# Altium PCB PCB1.PcbDoc
Units mil, origin at the board's own origin, x right, y up, seen from the top; angles counter-clockwise.
Board outline 1735.03 x 1910.03 mil, 2 copper layers (Top Layer, Bottom Layer); 47 components, 65 nets, 275 pads, 71 vias.
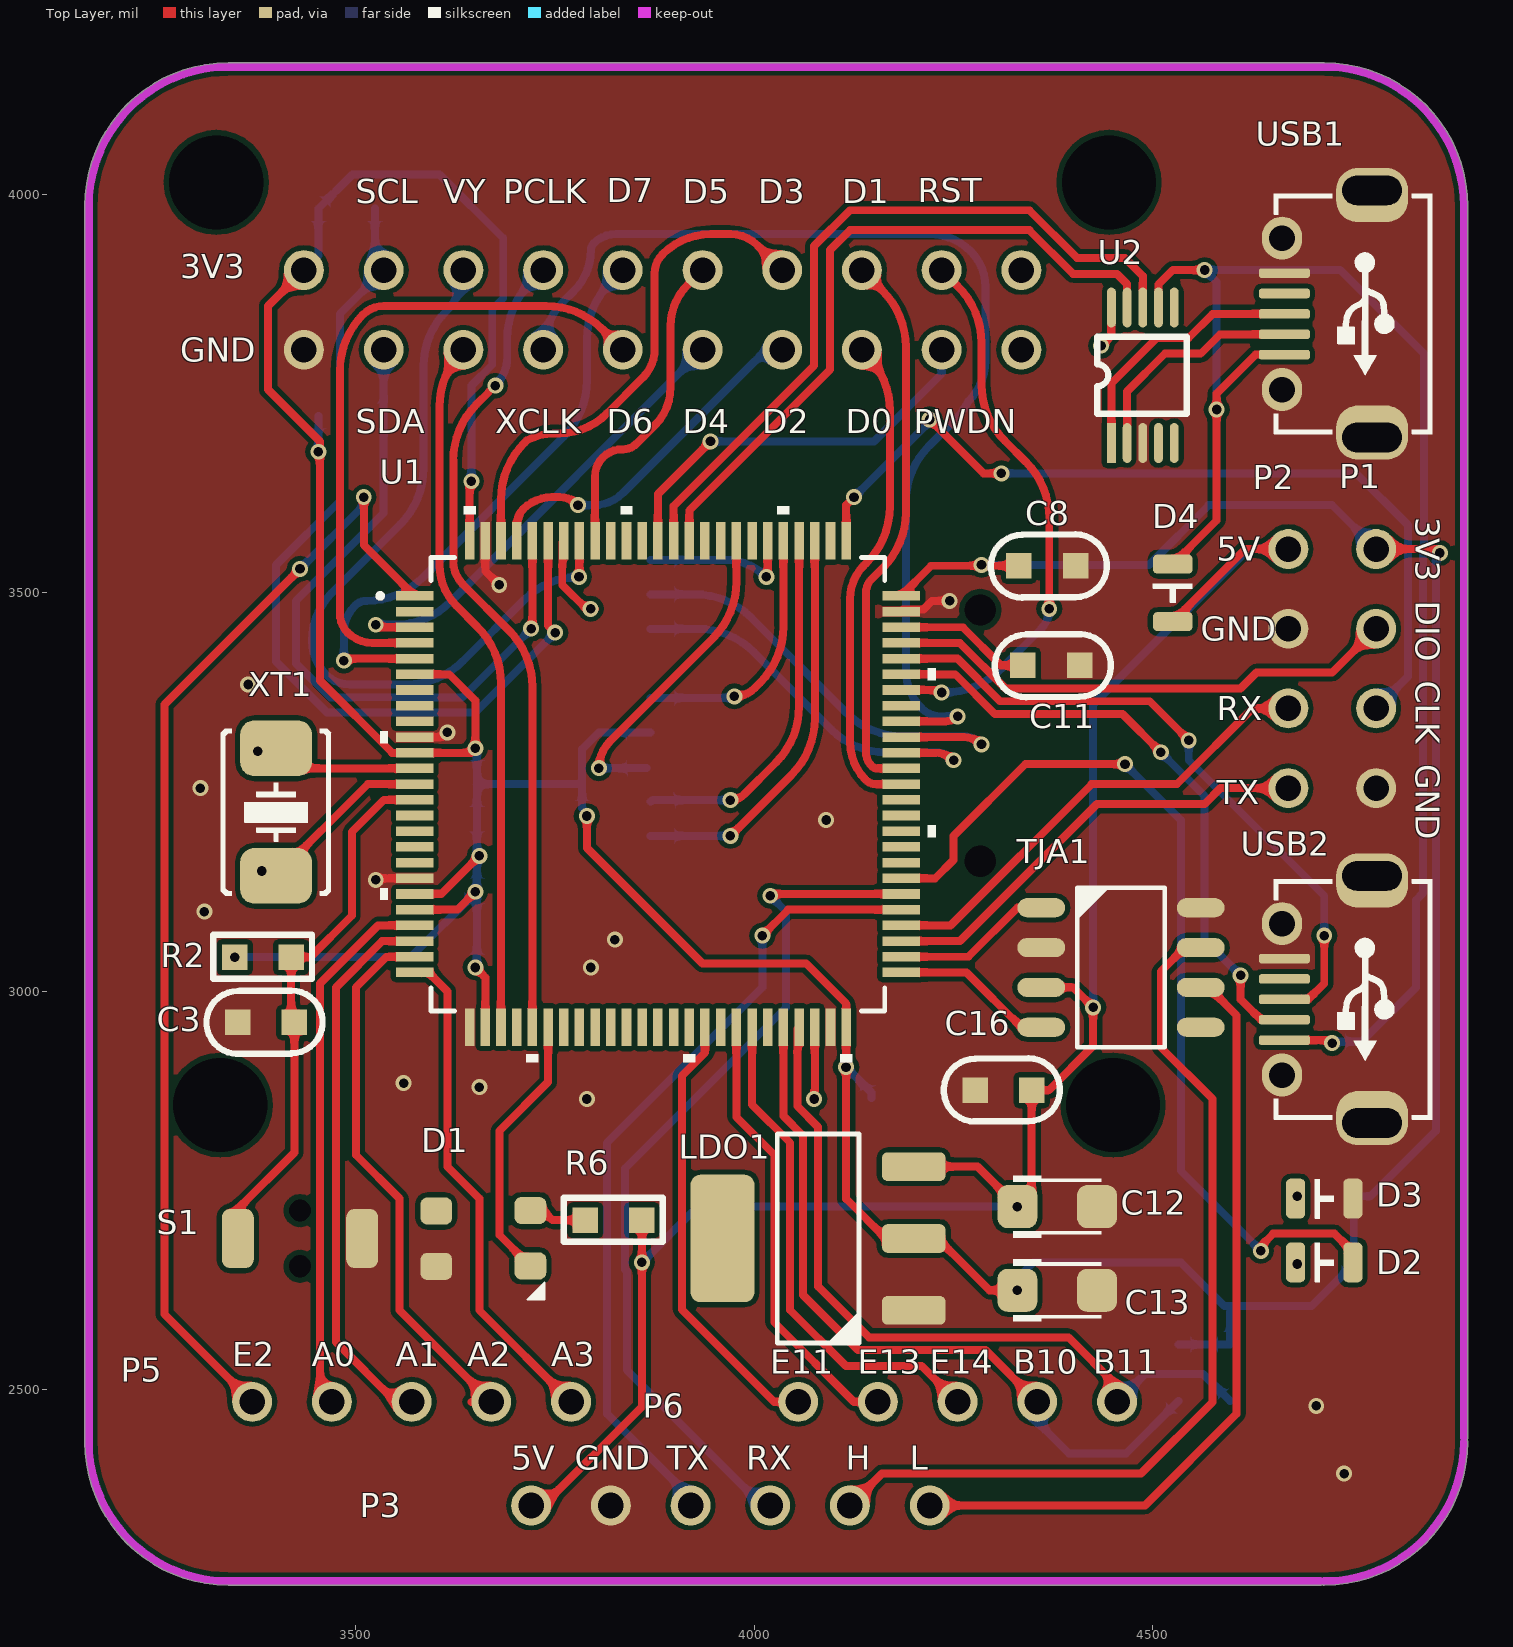
[diagram p0: Top Layer view]
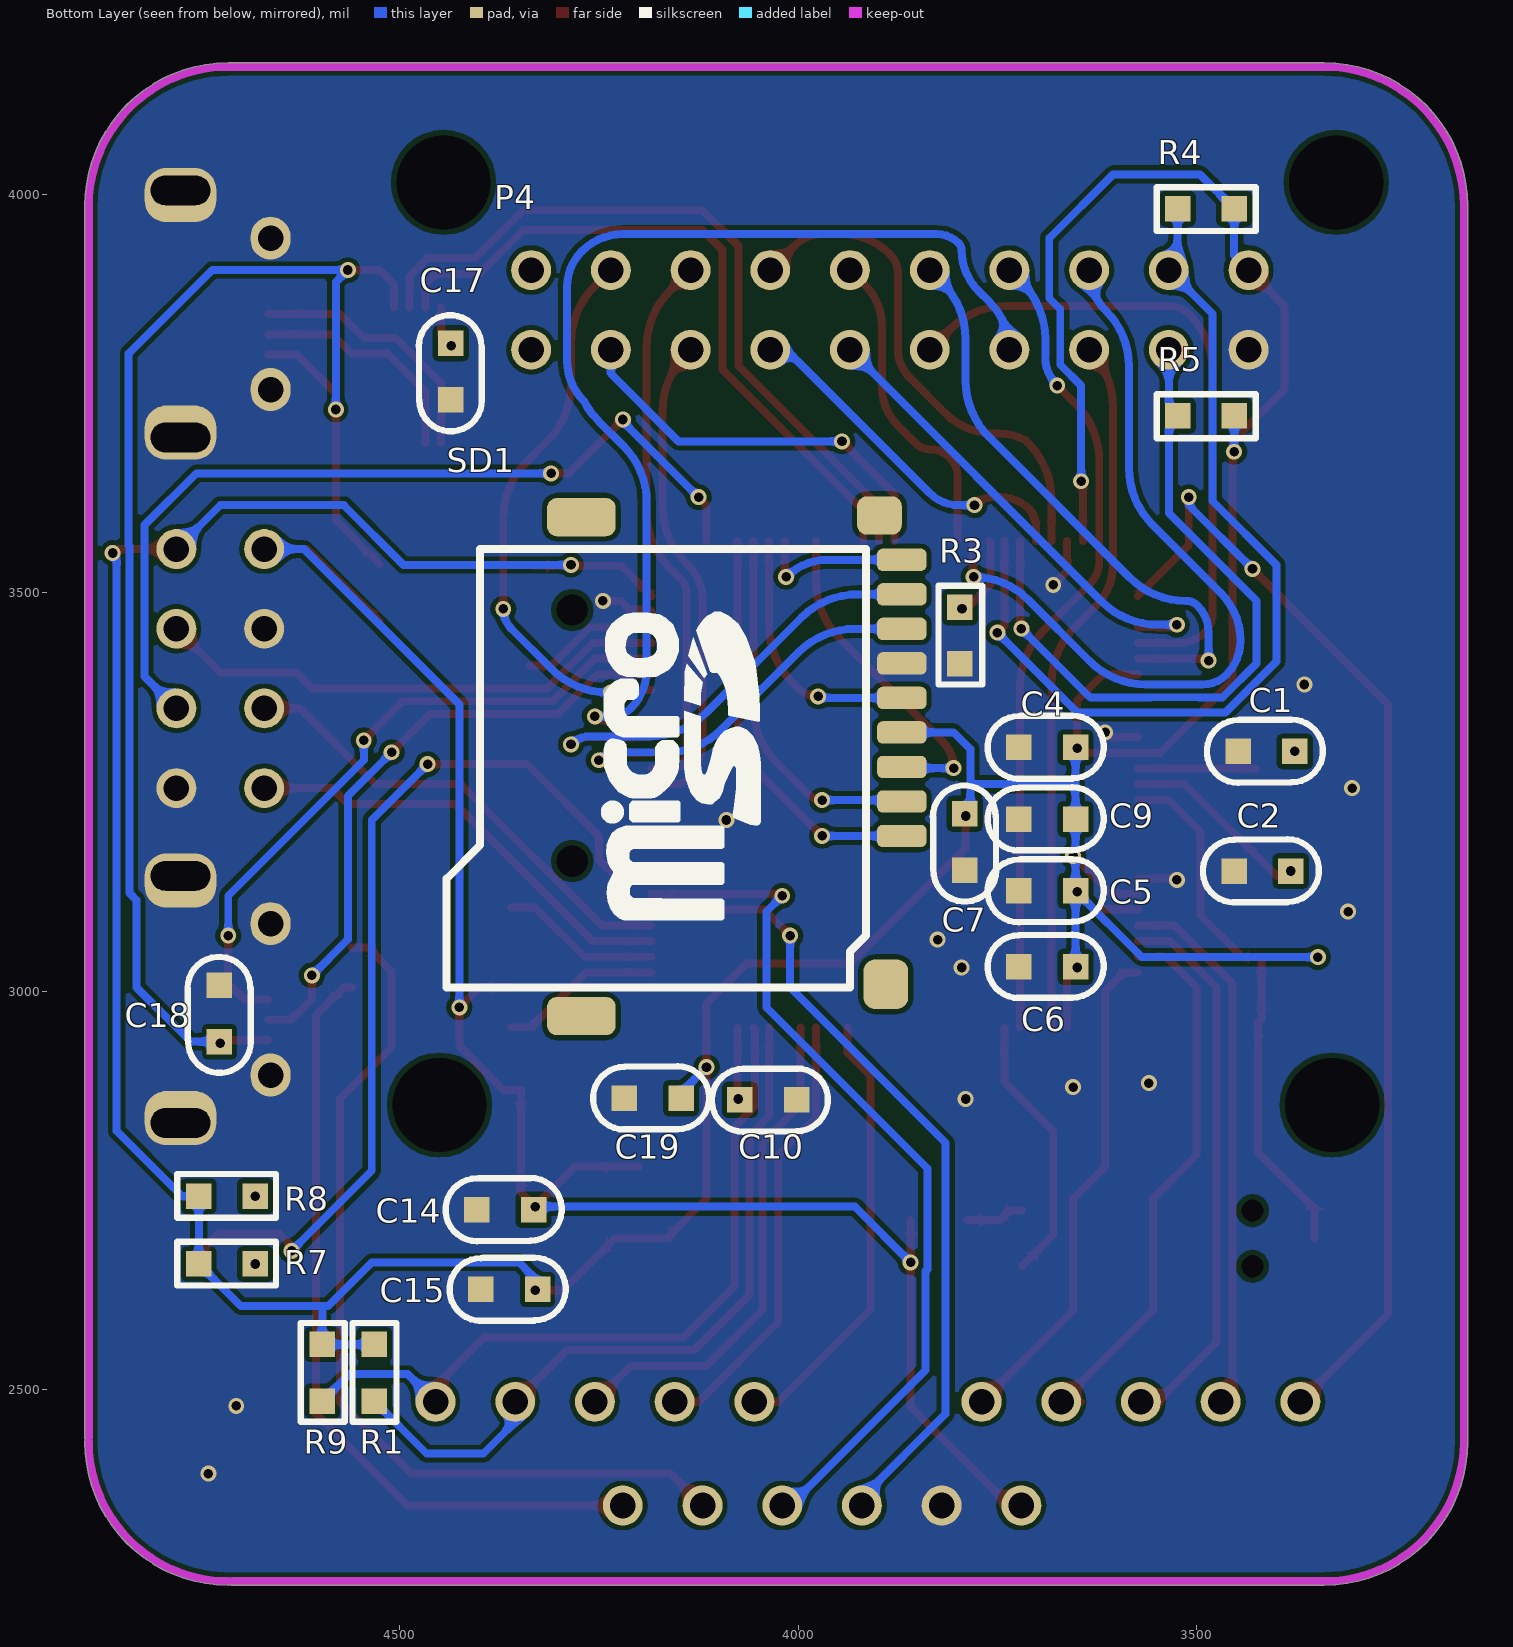
[diagram p1: Bottom Layer view, seen from below]
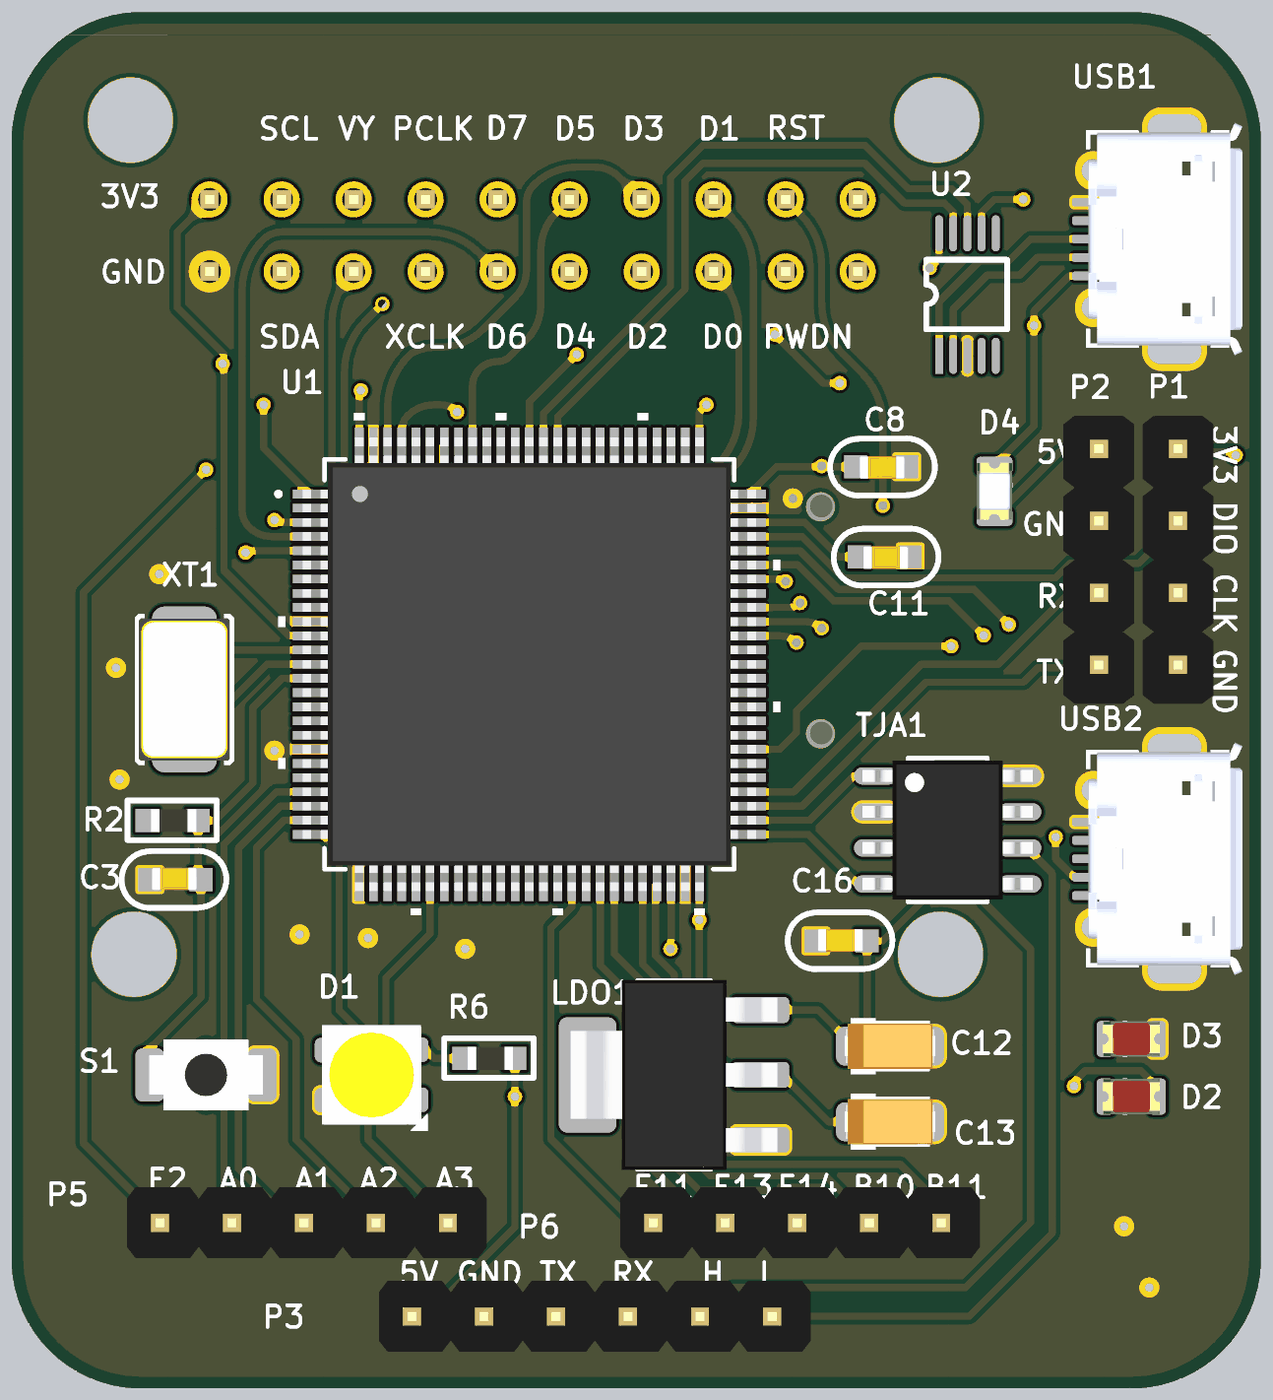
[diagram p2: 3D render of the assembled board from above, using the file's embedded part models]
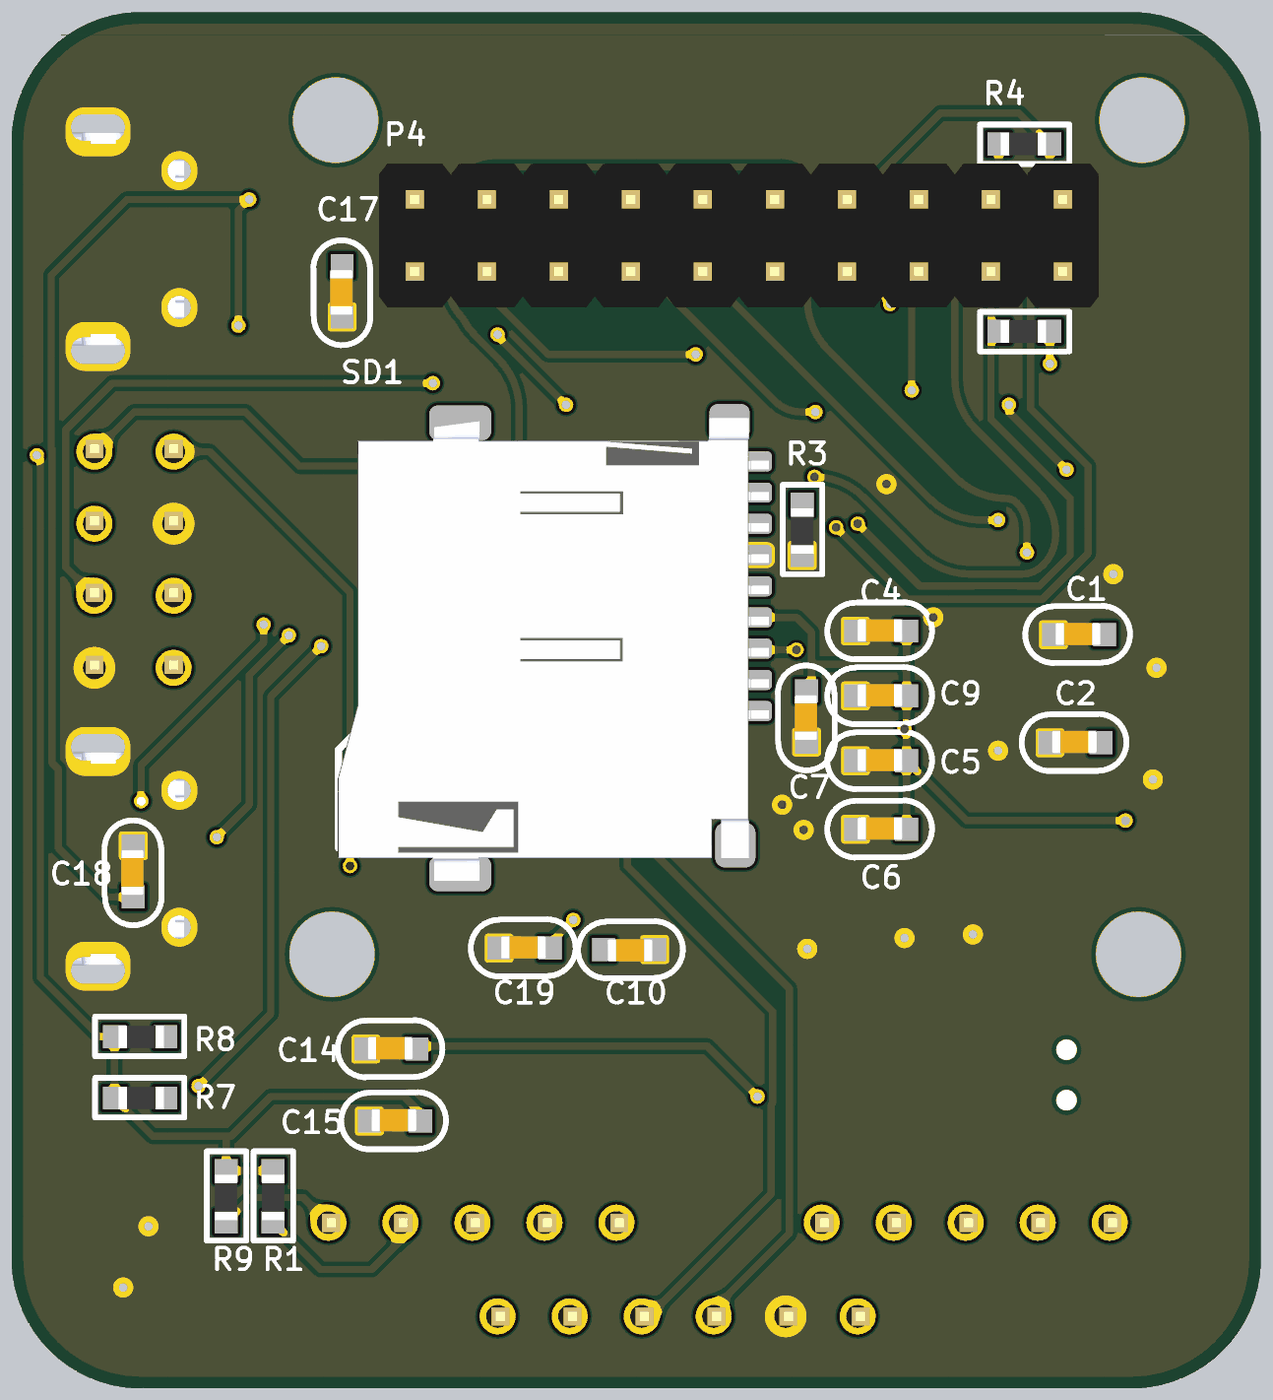
[diagram p3: 3D render of the assembled board from below, using the file's embedded part models]

## Layer stack, top to bottom
Top Solder: solder mask 0.4, Solder Resist, Dk 3.5
Top Layer: signal copper 1.4
Dielectric 1: dielectric 12.6, FR-4, Dk 4.8
Bottom Layer: signal copper 1.4
Bottom Solder: solder mask 0.4, Solder Resist, Dk 3.5

## Board outline
3159.99,2435 ccw(c3340,2435) 3340,2254.99 4710,2254.99 ccw(c4710,2260) 4712.5,2255.65 ccw(c4715,2260) 4715,2254.99 ccw(c4715,2435) 4895.02,2435 ccw(c4890,2435) 4894.35,2437.5 ccw(c4890,2440) 4895.02,2440 4895.02,3985 ccw(c4715,3985) 4715,4165.02 3340,4165.02 ccw(c3340,3985) 3159.99,3985

## Design rules (kind name [scope] priority, off if disabled: settings)
Clearance [All] p1: gap=6 ignorepadtopadclearanceinfootprint=FALSE
PlaneConnect [All] p1: planeconnectstyle=Direct reliefexpansion=20 reliefentries=4 reliefconductorwidth=10 reliefairgap=10
PolygonConnect [All] p1: connectstyle=Direct reliefconductorwidth=10 reliefentries=4 polygonreliefangle="90 Angle" airgapwidth=10
RoutingVias [All] p1: holewidth=28 width=50 viastyle="Through Hole" minholewidth=28 minwidth=50 maxholewidth=28 maxwidth=50
SolderMaskExpansion [All] p1: expansion=4
Width [All] p1: maxlimit=10 minlimit=10 preferedwidth=10
29 further rules are at their usual default settings.

## Components (designator, comment, footprint, x,y, rotation, side; value= is the part's Value field where it differs from the comment)
C1 "Cap_0603" CAP_0603 3415,3300 r180 bottom value=20pf
C2 "Cap_0603" CAP_0603 3420,3150 r180 bottom value=20pf
C3 "Cap_0603" CAP_0603 3385,2960 r0 top value=0.1u
C4 "Cap_0603" CAP_0603 3690,3305 r180 bottom value=0.1u
C5 "Cap_0603" CAP_0603 3690,3125 r180 bottom value=0.1u
C6 "Cap_0603" CAP_0603 3690,3030 r180 bottom value=0.1u
C7 "Cap_0603" CAP_0603 3790,3185 r90 bottom value=0.1u
C8 "Cap_0603" CAP_0603 4370,3535 r180 top value=0.1u
C9 "Cap_0603" CAP_0603 3690,3215 r180 bottom value=0.1u
C10 "Cap_0603" CAP_0603 4035,2865 r0 bottom value=?F
C11 "Cap_0603" CAP_0603 4375,3410 r180 top value=?F
C12 "Cap_Tan_1206" CAP_TAN_A1206 4380,2730 r0 top value=?F
C13 "Cap_Tan_1206" CAP_TAN_A1206 4380,2625 r0 top value=?F
C14 "Cap_0603" CAP_0603 4370,2725 r180 bottom value=0.1uF
C15 "Cap_0603" CAP_0603 4365,2625 r180 bottom value=0.1uF
C16 "Cap_0603" CAP_0603 4310,2875 r0 top value=0.1uF
C17 "Cap_0603" CAP_0603 4435,3775 r90 bottom value=1u
C18 "Cap_0603" CAP_0603 4725,2970 r90 bottom value=1u
C19 "Cap_0603" CAP_0603 4185,2865 r180 bottom value=0.1uF
D1 "LED_3535_SK6812" LED_3535_4P 3660,2690 r0 top
D2 "LED_0805" LED_0805_RED 4715,2660 r0 top
D3 "LED_0805" LED_0805_RED 4715,2740 r0 top
D4 "D_0805" LED_0805_YELLOW 4525,3500 r270 top
LDO1 "LDO1117" SOT223-3 4080,2690 r90 top
P1 "HDR1x4_2.54" HDR1x4_2.54_180 4780,3555 r0 top
P2 "HDR1x4_2.54" HDR1x4_2.54_180 4670,3555 r0 top
P3 "HDR1x6_2.54" HDR1X6_2.54_180 3720,2355 r90 top
P4 "HDR2x10_2.54" HDR2X10_2.54_180 3435,3905 r270 bottom locked
P5 "HDR1x5_2.54" HDR1X5_2.54_180 3370,2485 r90 top
P6 "HDR1x5_2.54" HDR1X5_2.54_180 4055,2485 r90 top
R1 "Res_0603" RES_0603 4450,2520 r270 bottom value=?K
R2 "Res_0603" RES_0603 3385,3125 r0 top value=10K
R3 "Res_0603" RES_0603 3715,3445 r270 bottom value=?K
R4 "Res_0603" RES_0603 3490,3900 r0 bottom value=?K
R5 "Res_0603" RES_0603 3490,3640 r0 bottom value=?K
R6 "Res_0603" RES_0603 3825,2795 r0 top value=10K
R7 "Res_0603" RES_0603 4715,2740 r180 bottom value=10K
R8 "Res_0603" RES_0603 4715,2825 r180 bottom value=10K
R9 "Res_0603" RES_0603 4515,2520 r270 bottom value=?K
S1 "ButtonTACT_3x4x2_180" ButtonTACT_3x4x2_180H 3430,2690 r0 top
SD1 "SD_Card_TF" SD_Card_TF 3870,3195 r90 bottom
TJA1 "TJA1050" SOP_E150_8 4460,3030 r0 top
U1 "STM32H7x3VIT" STM32H743VIT 3880,3290 r0 top locked value=Value
U2 "CH340E" MSOP10 4480,3770 r90 top
USB1 "USB_Micro" USB_Micro-AB 4765,3850 r270 top
USB2 "USB_Micro" USB_Micro-AB 4765,2990 r270 top
XT1 "XTAL_5032_2P" XT_5032_2 3400,3225 r90 top value=8M

## Footprints (in the part's own frame and the unit in brackets; to place one, negate y for a bottom-side part, rotate by r counter-clockwise, add the part's x,y. Pads: shape width x height; smd on the part's side, far side on the other; paste and mask are expansions set on the pad)
ButtonTACT_3x4x2_180H [mil]
  round 0 hole 28: 0(0,-35) 0(0,35)
  rrect50% 40x74 smd: 1(-78,0) 2(78,0)
  body extent -79,-49 79,49, height 63
CAP_0603 [mil]
  rect 32x32 smd: 1(-33,1) 2(38,1)
  silkscreen extent -72,-38 73,41, body extent -30,-14 33,18, height 31
CAP_TAN_A1206 [mil]
  rrect50% 50x54 smd: 1(-50,0) 2(50,0)
  silkscreen extent -55,-39 55,39, body extent -63,-31 63,32, height 71
HDR1x4_2.54_180 [mil]
  round 50 hole 32: 1(0,0) 2(0,-100) 3(0,-200) 4(0,-300)
  body extent -49,-350 49,50, height 323
HDR1X5_2.54_180 [mil]
  round 50 hole 32: 1(0,0) 2(0,-100) 3(0,-200) 4(0,-300) 5(0,-400)
  body extent -49,-450 49,50, height 323
HDR1X6_2.54_180 [mil]
  round 50 hole 32: 1(0,0) 2(0,-100) 3(0,-200) 4(0,-300) 5(0,-400) 6(0,-500)
  body extent -49,-550 49,50, height 323
HDR2X10_2.54_180 [mil]
  round 50 hole 32: 1(0,0) 2(100,0) 3(0,-100) 4(100,-100) 5(0,-200) 6(100,-200) 7(0,-300) 8(100,-300) 9(0,-400) 10(100,-400) 11(0,-500) 12(100,-500) 13(0,-600) 14(100,-600) 15(0,-700) 16(100,-700) 17(0,-800) 18(100,-800) 19(0,-900) 20(100,-900)
  body extent -50,-950 150,50, height 335
LED_0805_RED [mil]
  rrect50% 24x50 smd: 1(-36,0) 2(36,0)
  silkscreen extent -12,-24 12,24, body extent -40,-25 40,25, height 43
LED_0805_YELLOW [mil]
  rrect50% 24x50 smd: 1(-36,0) 2(36,0)
  silkscreen extent -12,-25 12,24, body extent -40,-25 40,25, height 43
LED_3535_4P [mil]
  rrect50% 40x34 smd: 1(-59,34.45) 2(-59,-35) 3(59,-34.45) 4(59,35)
  silkscreen extent 55,-77 77,-55, body extent -69,-69 69,69, height 26
MSOP10 [mil]
  rect 50x11 smd: 1(-82,32)
  oval 50x11 smd: 2(-82,12.31) 3(-82,-7.37) 4(-82,-27.06) 5(-82,-46.74) 6(88,-46.74) 7(88,-27.06) 8(88,-7.37) 9(88,12.31) 10(88,32)
  silkscreen extent -45,-63 51,50
RES_0603 [mil]
  rect 32x32 smd: 1(-37,-82) 2(34,-82)
  silkscreen extent -64,-109 60,-54, body extent -31,-98 31,-66, height 18
SD_Card_TF [mil]
  rrect50% 48x86 smd: 0(-226,402) 0(400,402)
  rrect50% 62x56 smd: 0(-186,20)
  round 30 hole 39.37 mask+0: 0(-31.5,413.39) 0(283.46,413.39)
  rrect50% 48x56 smd: 0(402,28)
  rrect50% 28x62 smd: 1(0,0) 2(43.31,0) 3(86.61,0) 4(129.92,0) 5(173.23,0) 6(216.54,0) 7(259.84,0) 8(303.15,0) 9(346.46,0)
  silkscreen extent -190,45 360,571, body extent -235,-27 407,572, height 79
SOP_E150_8 [mil]
  oval 60x24 smd: 1(-100,75) 2(-100,25) 3(-100,-25) 4(-100,-75) 5(100,-75) 6(100,-25) 7(100,25) 8(100,75)
  silkscreen extent -55,-100 55,100, body extent -118,-96 118,96, height 69
SOT223-3 [mil]
  rrect40% 36x80 smd: 1(-90.16,-120) 2(0,-120) 3(90.16,-120)
  rrect30% 160x80 smd: 4(0,120)
  silkscreen extent -131,-51 131,51, body extent -132,-144 132,144, height 71
STM32H743VIT [mil]
  rect 47x12 smd: 1(-306.12,206.22) 2(-306.12,186.54) 3(-306.12,166.85) 4(-306.12,147.17) 5(-306.12,127.48) 6(-306.12,107.8) 7(-306.12,88.11) 8(-306.12,68.43) 9(-306.12,48.74) 10(-306.12,29.06) 11(-306.12,9.37) 12(-306.12,-10.31) 13(-306.12,-30) 14(-306.12,-49.68) 15(-306.12,-69.37) 16(-306.12,-89.06) 17(-306.12,-108.74) 18(-306.12,-128.43) 19(-306.12,-148.11) 20(-306.12,-167.8) 21(-306.12,-187.48) 22(-306.12,-207.17) 23(-306.12,-226.85) 24(-306.12,-246.54) 25(-306.12,-266.22) 51(304.12,-266.22) 52(304.12,-246.54) 53(304.12,-226.85) 54(304.12,-207.17) 55(304.12,-187.48) 56(304.12,-167.8) 57(304.12,-148.11) 58(304.12,-128.43) 59(304.12,-108.74) 60(304.12,-89.06) 61(304.12,-69.37) 62(304.12,-49.68) 63(304.12,-30) 64(304.12,-10.32) 65(304.12,9.37) 66(304.12,29.06) 67(304.12,48.74) 68(304.12,68.43) 69(304.12,88.11) 70(304.12,107.8) 71(304.12,127.48) 72(304.12,147.17) 73(304.12,166.85) 74(304.12,186.54) 75(304.12,206.22)
  rect 12x47 smd: 26(-237.22,-335.12) 27(-217.54,-335.12) 28(-197.85,-335.12) 29(-178.17,-335.12) 30(-158.48,-335.12) 31(-138.8,-335.12) 32(-119.11,-335.12) 33(-99.43,-335.12) 34(-79.74,-335.12) 35(-60.06,-335.12) 36(-40.37,-335.12) 37(-20.68,-335.12) 38(-1,-335.12) 39(18.68,-335.12) 40(38.37,-335.12) 41(58.06,-335.12) 42(77.74,-335.12) 43(97.43,-335.12) 44(117.11,-335.12) 45(136.8,-335.12) 46(156.48,-335.12) 47(176.17,-335.12) 48(195.85,-335.12) 49(215.54,-335.12) 50(235.22,-335.12) 76(235.22,275.12) 77(215.54,275.12) 78(195.85,275.12) 79(176.17,275.12) 80(156.48,275.12) 81(136.8,275.12) 82(117.11,275.12) 83(97.43,275.12) 84(77.74,275.12) 85(58.06,275.12) 86(38.37,275.12) 87(18.68,275.12) 88(-1,275.12) 89(-20.68,275.12) 90(-40.37,275.12) 91(-60.06,275.12) 92(-79.74,275.12) 93(-99.43,275.12) 94(-119.11,275.12) 95(-138.8,275.12) 96(-158.48,275.12) 97(-178.17,275.12) 98(-197.85,275.12) 99(-217.54,275.12) 100(-237.22,275.12)
  silkscreen extent -352,-379 348,319, body extent -316,-345 314,285, height 63
USB_Micro-AB [mil]
  rrect80% 68x90 hole 37 slot 75 at 90 deg copper offset 6,0 mask+0: 0(-155,10)
  oval 54x50 hole 32 mask+0: 0(-95,-103) 0(95,-103)
  rrect80% 68x90 hole 37 slot 75 at 90 deg copper offset -6,0 mask+0: 0(155,10)
  rrect50% 12x64 smd: 1(51.18,-100) 2(25.59,-100) 3(0,-100) 4(-25.59,-100) 5(-51.18,-100)
  silkscreen extent -151,-113 151,86, body extent -161,-109 161,104, height 108
XT_5032_2 [mil]
  rrect50% 70x90 smd: 1(-80,0) 2(80,0)
  silkscreen extent -104,-68 104,68, body extent -98,-63 98,63, height 39

## Part data
C1 C2 C3 C4 C5 C6 C7 C8 C9 C10 C11 C12 C13 C14 C15 C16 C17 C18 C19: "Capacitor"
D1 D2 D3: "LED"
LDO1: "Power"
P1 P2 P3 P4 P5 P6: "Header"
R1 R2 R3 R4 R5 R6 R7 R8 R9: "Resistor"
S1: "Button"
SD1: "SD"
U1: "Imported", Manufacturer_Part_Number=stm32h7x3vit, Copyright="Copyright (C) 2016 Accelerated Designs. All rights reserved", RefDes=RefDes, Type=Type, Vendor=STMicroelectronics
U2: "USB to TTL Serial / UART"
USB1 USB2: "USB"
XT1: "Crystal Oscillator"

## Free pads (board coordinates)
  round 30 hole 118.11: 3(3325,4015) 3(3330,2857.4) 4(4445,4015) 4(4450,2857.4)

## Via types
v1: diameter 20, hole 12, Top Layer to Bottom Layer, 71 vias

## Nets (pads, with @x,y where several pads share a name; then routed paths per layer and width w, separated by ;. In a path a pad name is that pad's centre, name@x,y a point inside that pad or via, vN(x,y) a via of type N, cw(c..) or ccw(c..) an arc to the next point about the centre after c; other vN are vias at no path point)
3V3: C4.2 C5.2 C6.2 C7.2 C8.2 C9.2 C13.1 C15.2 C19.2 LDO1.2 P1.1 P4.1 R1.1 R2.1 R4.1 R5.1 R7.1 R8.1 R9.1 SD1.4 U1.6 U1.11 U1.20 U1.21 U1.27 U1.50 U1.75 U1.100 | length 6295.9
  Top Layer w10: P4.1 3390,3860 3390,3755 3455,3690 3455,3390 3545.63,3299.37 U1.11 3644.37,3299.37 v1(3650,3305) 3650,3365 3617.2,3397.8 U1.6 ; U1.21 3627.52,3102.52 v1(3650,3125) ; U1.20 3607.2,3122.2 v1(3655,3170) ; U1.100 3642.78,3637.78 v1(3645,3640) ; v1(3650,3030) 3662.46,3017.54 U1.27 ; v1(3790,3220) 3790,3180 3935,3035 4065,3035 4115.22,2984.78 U1.50 4115.22,2739.78 4165,2690 LDO1.2 4230,2690 4295,2625 v1(4330,2625) ; U1.75 4221.9,3534 C8.2 ; P1.1 4860,3555 v1(4860,3550)
  Bottom Layer w10: v1(3348,3043) 3569,3043 C5.2 ; P4.1 3453,3923 R4.1 3496,4025 3605,4025 3685,3945 3685,3869.63 3671.2,3855.82 3671.2,3786.2 3645,3760 v1(3645,3640) ; v1(3453,3677) R5.1 ; C6.2 C5.2 ; C4.2 3652,3260 ; C7.2 3784,3230 3784,3265 ; SD1.4 3804.92,3324.92 3784,3304 3784,3265 ; v1(4115,2905) 4147,2873 C19.2 ; v1(4285,3535) 4495,3535 4570,3610 4725,3610 P1.1 ; C15.2 4327,2637 4350,2660 4535,2660 4590,2605 4699,2605 R7.1 R8.1 4773,2743 4855,2825 4855,3545 v1(4860,3550) ; R1.1 R9.1 4597,2598 ; C5.2 C9.2 3652,3260 ; 3652,3260 3779,3260 3784,3265
5V: C12.1 C14.2 C16.2 D4.2 LDO1.3 P2.1 P3.1 R6.2 TJA1.3 | length 2329.6
  Top Layer w10: P3.1@3735,2355 3859,2479 v1(3859,2660) R6.2 ; LDO1.3 4279.84,2780.16 v1(4330,2730) 4348,2748 C16.2 4369.53,2876 4425,2931.47 v1(4425,2980) 4400,3005 TJA1.3 ; D4.2 4616,3555 P2.1
  Bottom Layer w10: v1(3859,2660) 3929,2730 4328,2730 C14.2 ; v1(4425,2980) 4425,3360 4620,3555 P2.1
ADC_CH15: P5.5 U1.25 | length 630.2
  Top Layer w10: U1.25 3591.22,3023.78 3615,3000 3615,2780 3655,2740 3655,2600 P5.5
CAN2_RX: TJA1.4 U1.51 | length 204.4
  Top Layer w10: U1.51 4266.22,3023.78 4335,2955 TJA1.4
CAN2_TX: TJA1.1 U1.52 | length 201.4
  Top Layer w10: U1.52 4268.46,3043.46 4330,3105 TJA1.1
CAN_H: P3.5 TJA1.7 | length 1138.2
  Top Layer w10: P3.5 4160,2395 4485,2395 4575,2485 4575,2865 4510,2930 4510,3025 4540,3055 TJA1.7
CAN_L: P3.6 TJA1.6 | length 992.1
  Top Layer w10: P3.6 4490,2355 4605,2470 4605,2970 4570,3005 TJA1.6
DCMI_CLK: P4.8 U1.67 | length 1370.9
  Top Layer w10: U1.67 4239.89,3338.74 ccw(c4239.89,3360.11) v1(4255,3345)
  Bottom Layer w10: P4.8 cw(c3819.5,3805) 3759.75,3864.75 3773.79,3878.79 ccw(c3722.57,3930) 3795,3930 cw(c3807.07,3930) 3798.54,3938.54 cw(c3826.21,3910.86) 3826.21,3950 4219.64,3950 cw(c4219.64,3876.72) 4271.46,3928.54 cw(c4226.72,3883.79) 4290,3883.79 4290,3791.58 cw(c4217.87,3791.58) 4268.87,3740.58 cw(c4180,3786.42) 4250.71,3715.71 4219.29,3684.29 ccw(c4290,3613.58) 4190,3613.58 4190,3403.28 ccw(c4258.28,3403.28) 4210,3355 ccw(c4234.14,3379.14) 4234.14,3345 v1(4255,3345)
DCMI_D0: P4.16 U1.63 | length 606.8
  Top Layer w10: P4.16@4140.71,3799.29 cw(c4070,3728.58) 4170,3728.58 4170,3608.21 cw(c4070,3608.21) 4161.62,3568.14 cw(c4070,3608.21) 4140.71,3537.5 4137.23,3534.02 ccw(c4178.82,3492.43) 4120,3492.43 4120,3313.28 ccw(c4188.28,3313.28) 4140,3265 ccw(c4152.07,3277.07) 4152.07,3260 U1.63
DCMI_D1: P4.15 U1.64 | length 695.9
  Top Layer w10: P4.15 4160.71,3879.29 cw(c4090,3808.58) 4190,3808.58 4190,3600.36 cw(c4092.57,3600.36) 4161.46,3531.46 4147.07,3517.07 ccw(c4164.14,3500) 4140,3500 4140,3300.45 ccw(c4165.45,3300.45) 4147.46,3282.46 ccw(c4154.14,3289.14) 4154.14,3279.69 U1.64
DCMI_D2: P4.14 U1.97 | length 452.7
  Top Layer w10: U1.97 3701.83,3585.29 cw(c3729.71,3585.29) 3710,3605 cw(c3746.21,3568.79) 3746.21,3620 3755.86,3620 cw(c3755.86,3585.86) 3780,3610 v1(3778.75,3610)
  Bottom Layer w10: v1(3778.75,3610) 3798.58,3610 ccw(c3798.58,3661.72) 3835.15,3625.15 4000.86,3790.86 cw(c4035,3756.72) P4.14
DCMI_D3: P4.13 U1.98 | length 642.4
  Top Layer w10: U1.98 3682.15,3617.32 cw(c3782.15,3617.32) 3711.44,3688.03 3714.42,3691.01 cw(c3748.28,3631.72) 3748.28,3700 3755,3700 ccw(c3755,3784.5) 3814.75,3724.75 3860,3770 ccw(c3823.79,3806.21) 3875,3806.21 3875,3900.86 cw(c3909.14,3900.86) 3885,3925 cw(c3945.36,3864.64) 3945.36,3950 3970,3950 cw(c3970,3901.72) 4004.14,3935.86 P4.13
DCMI_D4: P4.12 U1.3 | length 598.3
  Top Layer w10: v1(3525,3460) ccw(c3532.6,3467.6) 3532.6,3456.85 U1.3
  Bottom Layer w10: v1(3525,3460) 3548.58,3460 ccw(c3548.58,3560) 3619.29,3489.29 P4.12
DCMI_D5: P4.11 U1.92 | length 400.2
  Top Layer w10: U1.92@3800,3565.38 3800,3645.86 cw(c3834.14,3645.86) 3810,3670 cw(c3834.14,3645.86) 3834.14,3680 3835,3680 ccw(c3835,3704.14) 3852.07,3687.07 3875,3710 ccw(c3826.72,3758.28) 3895,3758.28 3895,3835 cw(c3967.43,3835) 3916.21,3886.21 P4.11
DCMI_D6: P4.10 U1.4 | length 844.2
  Top Layer w10: U1.4 3520.99,3437.17 cw(c3520.99,3480.99) 3490,3450 cw(c3514.14,3474.14) 3480,3474.14 3480,3778.58 cw(c3580,3778.58) 3509.29,3849.29 cw(c3535.15,3823.43) 3535.15,3860 3738.58,3860 cw(c3738.58,3760) 3809.29,3830.71 P4.10
DCMI_D7: P4.9 U1.5 | length 738
  Top Layer w10: v1(3485,3415) cw(c3490.99,3409.01) 3490.99,3417.48 U1.5
  Bottom Layer w10: v1(3485,3415) 3485,3450.29 cw(c3532.57,3450.29) 3498.93,3483.93 cw(c3513.58,3469.29) 3513.58,3490 ccw(c3513.58,3590) 3584.29,3519.29 3760.71,3695.71 ccw(c3690,3766.42) 3790,3766.42 3790,3818.58 cw(c3890,3818.58) 3819.29,3889.29 P4.9
DCMI_HSYNC: P4.6 U1.28 | length 881.8
  Top Layer w10: P4.6@3634.29,3804.29 ccw(c3705,3733.58) 3605,3733.58 3605,3535 ccw(c3677.43,3535) 3626.21,3483.79 3652.86,3457.14 cw(c3582.15,3386.43) 3682.15,3386.43 U1.28
DCMI_PCLK: P4.7 U1.30 | length 1010.2
  Top Layer w10: 3667.32,3752.32 3651.57,3736.57 ccw(c3722.28,3665.86) 3622.28,3665.86 3622.28,3539.65 ccw(c3663.17,3539.65) 3634.26,3510.74 3692.23,3452.77 cw(c3621.52,3382.06) 3721.52,3382.06 U1.30
  Bottom Layer w10: v1(3675,3760) ccw(c3638.79,3796.21) 3690,3796.21 3690,3818.58 cw(c3790,3818.58) 3719.29,3889.29 P4.7
DCMI_PWDN: P4.18 U1.88 | length 507.4
  Top Layer w10: U1.88 3879,3624 v1(3945,3690)
  Bottom Layer w10: v1(3945,3690) 4150,3690 4235,3775 P4.18
DCMI_RST: P4.17 U1.69 | length 701.1
  Top Layer w10: U1.69 4227.49,3378.11 cw(c4227.49,3367.49) v1(4235,3375) ; P4.17 4255.71,3884.29 cw(c4185,3813.58) 4285,3813.58 4285,3761.42 ccw(c4385,3761.42) 4314.29,3690.71 4340.71,3664.29 cw(c4270,3593.58) 4370,3593.58 v1(4370,3480)
  Bottom Layer w10: v1(4235,3375) 4238.58,3375 ccw(c4238.58,3475) 4309.29,3404.29 4359.39,3454.39 ccw(c4333.79,3480) v1(4370,3480)
DCMI_VSYNC: P4.5 U1.93 | length 989.2
  Top Layer w10: v1(3780,3520) ccw(c3778.61,3521.39) 3780.57,3521.39 U1.93
  Bottom Layer w10: P4.5 cw(c3562.57,3905) 3613.79,3853.79 ccw(c3683.28,3784.29) 3585,3784.29 3585,3656.42 cw(c3485,3656.42) 3555.71,3585.71 3469.75,3499.75 ccw(c3529.5,3440) 3445,3440 ccw(c3505.36,3440) 3462.68,3397.32 ccw(c3492.43,3427.07) 3492.43,3385 3563.58,3385 ccw(c3563.58,3485) 3634.29,3414.29 3711.72,3491.72 cw(c3780,3423.43) v1(3780,3520)
DM: U2.2 USB1.2 | length 291.7
  Top Layer w10: U2.2 4467.69,3752.68 4515,3800 4560,3800 4584.41,3824.41 USB1.2
DP: U2.1 USB1.3 | length 328
  Top Layer w10: U2.1 4448,3763 4505,3820 4545,3820 4575,3850 USB1.3
GND: C1.1 C2.1 C3.1 C4.1 C5.1 C6.1 C7.1 C8.1 C9.1 C10.1 C11.1 C12.2 C13.2 C14.1 C15.1 C16.1 C17.1 C18.2 C19.1 D1.2 D3.2 LDO1.1 P1.4 P2.2 P3.2 P4.2 R3.2 S1.2 SD1.6 TJA1.2 TJA1.8 U1.10 U1.19 U1.26 U1.49 U1.74 U1.99 U2.3 USB1.0 USB1.5 USB2.0 USB2.5 | length 222.1
  Top Layer w10: v1(3525,3140) 3526.89,3141.89 U1.19 ; U1.10 3609.06,3319.06 v1(3615,3325) ; U1.99 3662.46,3527.54 v1(3680,3510) ; U1.74 4186.8,3479.22 4212.17,3479.22 4222.95,3490 v1(4245,3490)
  other v1: 4740,2395 4705,2480 3790,2865 3655,2880 3560,2885 3795,3030 3825,3065 3310,3100 4090,3215 3305,3255 3365,3385
I2C1_SCL: P4.3 R4.2 U1.95 | length 1165.3
  Top Layer w10: U1.95 3741.2,3458.8 v1(3750,3450)
  Bottom Layer w10: R4.2 3524,3916 P4.3 3480,3850 3480,3615 3400,3535 3400,3413.81 3463.81,3350 3650,3350 v1(3750,3450)
I2C1_SDA: P4.4 R5.2 U1.96 | length 896.8
  Top Layer w10: v1@3721.52,3456.52 U1.96
  Bottom Layer w10: P4.4 3535,3600 3425,3490 3425,3411.44 3467.94,3368.5 3497.24,3368.5 3497.74,3369 3558.26,3369 3558.83,3368.44 3633.44,3368.44 v1(3720,3455)
I2C2_SCL: P6.4 R1.2 U1.46 | length 941.4
  Top Layer w10: U1.46 4036.48,2843.52 4061,2819 4061,2619 4130,2550 4290,2550 P6.4
  Bottom Layer w10: P6.4 4355,2460 4395,2420 4466,2420 R1.2
I2C2_SDA: P6.5 R9.2 U1.47 | length 933.9
  Top Layer w10: U1.47 4054,2952.72 4054,2856 4080,2830 4080,2630 4144,2566 4394,2566 P6.5@4455,2505
  Bottom Layer w10: P6.5 4490,2520 4563,2520 R9.2
LED: D2.2 U1.57 | length 1189.2
  Top Layer w10: U1.57 4226.89,3141.89 4250,3165 4250,3195 4340,3285 v1(4465,3285) ; v1(4635.43,2674.57) 4635.43,2680.43 4651,2696 4728,2696 4751,2673 D2.2
  Bottom Layer w10: v1(4465,3285) 4535,3215 4535,2775 v1(4635.43,2674.57)
LED_PWM: D1.3 U1.31 | length 340.8
  Top Layer w10: D1.3 3680,2694.55 3680,2825 3741.2,2886.2 U1.31
NetC1_2: C1.2 U1.12 XT1.2 | length 148.6
  Top Layer w10: XT1.2@3425.31,3279.69 U1.12
  other v1: 3377,3301
NetC2_2: C2.2 U1.13 XT1.1 | length 221.5
  Top Layer w10: XT1.1 3515,3260 U1.13
  other v1: 3382,3151
NetC10_2: C10.2 U1.48 | length 90.2
  Top Layer w10: v1(4075,2865) 4075,2875 4075.85,2875.85 U1.48
NetC11_2: C11.2 U1.73 | length 172.7
  Top Layer w10: U1.73 4261.61,3456.85 4309.46,3409 C11.2
NetC17_2: C17.2 U2.10 | length 53.4
  Top Layer w10: v1(4435,3810) 4448,3823 U2.10
NetD1_4: D1.4 R6.1 | length 74
  Top Layer w10: D1.4 3735,2725 3747,2713 R6.1
NetD2_1: D2.1 R7.2
  other v1: 4681,2658
NetD3_1: D3.1 R8.2
  other v1: 4681,2743
NetR3_1: R3.1 U1.94 | length 109.3
  Top Layer w10: U1.94 3759,3563.23 3759,3510 3789,3480 v1@3800,3480
  other v1: 3794.5,3480
NRST: C3.2 R2.2 S1.1 U1.14 | length 676.5
  Top Layer w10: S1.1 3352,2727 3423,2798 C3.2 ; C3.2@3419,2965 R2.2 3443,3043 3495,3095 3495,3200 3535.32,3240.32 U1.14
SDIO_CD: SD1.9 U1.81 | length 194.1
  Top Layer w10: v1@4016.8,3521.8 U1.81
  Bottom Layer w10: SD1.9 3963.2,3541.46 cw(c3963.2,3468.2) v1(4015,3520)
SDIO_CLK: SD1.5 U1.80 | length 329
  Top Layer w10: v1(3975,3370) ccw(c3975,3406.21) 4000.61,3380.61 4007.19,3387.19 ccw(c3936.48,3457.9) 4036.48,3457.9 U1.80
  Bottom Layer w10: SD1.5 3970.72,3368.23 ccw(c3970.72,3374.28) v1(3975,3370)
SDIO_CMD: SD1.3 U1.83 | length 410.2
  Top Layer w10: v1(3805,3280) cw(c3853.28,3280) 3819.14,3314.14 3948.14,3443.14 ccw(c3877.43,3513.85) 3977.43,3513.85 U1.83
  Bottom Layer w10: v1(3805,3280) SD1.3@3865,3280
SDIO_D0: SD1.7 U1.65 | length 506.7
  Top Layer w10: U1.65 4227.38,3299.37 cw(c4227.38,3267.38) v1(4250,3290)
  Bottom Layer w10: SD1.7 3928.74,3454.84 cw(c3928.74,3354.84) 3999.45,3425.55 4096.72,3328.28 ccw(c4165,3396.57) 4165,3300 4225.86,3300 cw(c4225.86,3265.86) v1(4250,3290)
SDIO_D1: SD1.8 U1.66 | length 586.2
  Top Layer w10: U1.66 4263.14,3319.06 cw(c4263.14,3288.14) v1(4285,3310)
  Bottom Layer w10: SD1.8 3925.43,3498.15 cw(c3925.43,3398.15) 3996.14,3468.86 4115.71,3349.29 ccw(c4186.42,3420) 4186.42,3320 4260.86,3320 cw(c4260.86,3285.86) v1(4285,3310)
SDIO_D2: SD1.1 U1.78 | length 509.7
  Top Layer w10: v1(3970,3195) 4046.56,3271.56 ccw(c3975.85,3342.27) 4075.85,3342.27 U1.78
  Bottom Layer w10: SD1.1 v1(3970,3195)
SDIO_D3: SD1.2 U1.79 | length 461.8
  Top Layer w10: v1(3970,3240) ccw(c3970,3264.14) 3987.07,3247.07 4026.88,3286.88 ccw(c3956.17,3357.59) 4056.17,3357.59 U1.79
  Bottom Layer w10: SD1.2 cw(c3874.09,3234.22) 3874.09,3240 v1(3970,3240)
SPI4_CLK: P5.1 U1.1 | length 1434.4
  Top Layer w10: P5.1 3259.94,2595.06 3259.94,3359.94 v1(3430,3530) ; v1(3510,3620) 3510,3560.1 U1.1
  Bottom Layer w10: v1(3430,3530) 3510,3610 v1(3510,3620)
SPI4_MISO: P6.2 U1.43 | length 561
  Top Layer w10: U1.43 3977.43,2842.57 4025,2795 4025,2585 4125,2485 P6.2
SPI4_MOSI: P6.3 U1.44 | length 632.4
  Top Layer w10: U1.44 3997.11,2857.89 4045,2810 4045,2600 4115,2530 4210,2530 P6.3
SPI4_NSS: P6.1 U1.41 | length 560
  Top Layer w10: U1.41 3938.06,2923.07 3909,2894.01 3909,2601 4025,2485 P6.1
SWCLK: P1.3 U1.76 | length 1099.7
  Top Layer w10: U1.76 4115.22,3610.22 v1(4125,3620) ; v1(4220,3717.5) 4287.5,3650 v1(4310,3650)
  Bottom Layer w10: v1(4125,3620) 4220,3715 v1(4220,3717.5) v1@4220,3720 ; v1(4310,3650) 4755,3650 4820,3585 4820,3395 P1.3
SWDIO: P1.2 U1.72 | length 650.6
  Top Layer w10: U1.72 4257.83,3437.17 4315,3380 4610,3380 4630,3400 4725,3400 P1.2
TIM5_CH1: P5.2 U1.22 | length 680.3
  Top Layer w10: P5.2 3455,2500 3455,3010 3527.83,3082.83 U1.22
TIM5_CH2: P5.3 U1.23 | length 694
  Top Layer w10: P5.3 3550,2485 3475,2560 3475,3005 3533.15,3063.15 U1.23
TIM5_CH3: P5.4 U1.24 | length 705.2
  Top Layer w10: U1.24 3538.46,3043.46 3500,3005 3500,2795 3555,2740 3555,2600 P5.4 P5.4@3645,2485
USART1_RX: P2.3 U1.54 | length 598.6
  Top Layer w10: U1.54 4246.11,3082.83 4423.28,3260 4530,3260 4625,3355 P2.3
USART1_TX: P2.4 U1.53 | length 565.3
  Top Layer w10: U1.53 4258.15,3063.15 4430,3235 4565,3235 4585,3255 P2.4
USART2_RX: U1.87 U2.8 | length 947.7
  Top Layer w10: U1.87 3898.68,3608.68 4075,3785 4075,3935 4120,3980 4345,3980 4405,3920 4465,3920 4487.37,3897.63 U2.8
USART2_TX: U1.86 U2.9 | length 878.4
  Top Layer w10: U1.86 3918.37,3603.37 4095,3780 4095,3930 4120,3955 4345,3955 4400,3900 4455,3900 4467.69,3887.32 U2.9
USART3_RX: P3.4 U1.56 | length 1103.2
  Top Layer w10: v1(4020,3120) 4022.2,3122.2 U1.56
  Bottom Layer w10: P3.4 4010,2355 3840,2525 3840,2649.3 3838,2651.3 3838,2778 4040,2980 4040,3100 v1(4020,3120)
USART3_TX: P3.3 U1.55 | length 1026.9
  Top Layer w10: v1(4010,3070) 4042.52,3102.52 U1.55
  Bottom Layer w10: P3.3 3920,2365 3815,2470 3815,2810 4010,3005 v1(4010,3070)
USB_DM: U1.70 USB2.2 | length 783.4
  Top Layer w10: U1.70 4251.95,3397.8 4301.75,3348 4462,3348 v1(4510,3300) ; v1(4610,3020) 4610,2990 4635.59,2964.41 USB2.2
  Bottom Layer w10: v1(4510,3300) 4565,3245 4565,3065 v1(4610,3020)
USB_DP: U1.71 USB2.3 | length 837
  Top Layer w10: U1.71 4254.89,3417.48 4308.37,3364 4496,3364 v1(4545,3315) ; USB2.3 4695,2990 4715,3010 v1(4715,3070)
  Bottom Layer w10: v1(4545,3315) 4545,3290 4715,3120 v1(4715,3070)
VUSB: C18.1 D4.1 U2.7 USB1.1 USB2.1 | length 1929
  Top Layer w10: U2.7 4507.06,3887.06 4525,3905 v1(4565,3905) ; D4.1 4580,3591 v1(4580,3730) 4580,3750 4628.82,3798.82 USB1.1 ; USB2.1 4721.18,2938.82 v1(4725,2935)
  Bottom Layer w10: v1(4580,3730) 4580,3890 v1(4565,3905) 4735,3905 4840,3800 4840,3559.7 4839,3558.7 4839,3123.38 4830,3114.38 4830,3005 4762,2937 C18.1
pads on no net: D1.1 LDO1.4 P4.19 P4.20 S1.0 SD1.0 TJA1.5 U1.2 U1.7 U1.8 U1.9 U1.15 U1.16 U1.17 U1.18 U1.29 U1.32 U1.33 U1.34 U1.35 U1.36 U1.37 U1.38 U1.39 U1.40 U1.42 U1.45 U1.58 U1.59 U1.60 U1.61 U1.62 U1.68 U1.77 U1.82 U1.84 U1.85 U1.89 U1.90 U1.91 U2.4 U2.5 U2.6 USB1.4 USB2.4

## Polygon pours and split planes (outlines as drawn)
GND on Bottom Layer "Top Layer-No Net" (solid, remove dead copper, pour order 2): 3020,4265 5000,4265 5015,4250 4995,4230 4995,2190 3130,2190 3105,2165
GND on Top Layer "Top Layer-No Net" (solid, remove dead copper, pour order 4): 3010,4270 3055,4225 4995,4225 4995,2180 5020,2155 3065,2155

## Keep-outs
Keep-Out Layer:
  lines w10: 4710,2260 3340,2260 cw(c3340,2435) 3165,2435 3165,3985 cw(c3340,3985) 3340,4160 4715,4160 cw(c4715,3985) 4890,3985 4890,2440 ; 4715,2260 ccw(c4715,2435) 4890,2435

## Silkscreen, mask and mechanical layers (free items; w line width, h text height)
Top Overlay:
  text "D7" at 3815,3990 h30
  text "RST" at 4205,3990 h30
  text "SCL" at 3500,3989 h30
  text "VY" at 3610,3989 h30
  text "PCLK" at 3685,3989 h30
  text "D5" at 3910,3989 h30
  text "D3" at 4005,3989 h30
  text "D1" at 4110,3989 h30
  text "3V3" at 3280,3895 h30
  text "GND" at 3280,3790 h30
  text "SDA" at 3500,3700 h30
  text "XCLK" at 3675,3700 h30
  text "D6" at 3815,3700 h30
  text "D4" at 3910,3700 h30
  text "D2" at 4010,3700 h30
  text "D0" at 4115,3700 h30
  text "PWDN" at 4200,3700 h30
  text "3V3" at 4830,3595 h30 r270
  text "5V" at 4580,3540 h30
  text "DIO" at 4830,3490 h30 r270
  text "GND" at 4560,3440 h30
  text "CLK" at 4830,3390 h30 r270
  text "RX" at 4580,3340 h30
  text "GND" at 4830,3285 h30 r270
  text "TX" at 4580,3235 h30
  text "E2" at 3345,2530 h30
  text "A0" at 3445,2530 h30
  text "A1" at 3550,2530 h30
  text "A2" at 3640,2530 h30
  text "A3" at 3745,2530 h30
  text "E11" at 4020,2520 h30
  text "E13" at 4130,2520 h30
  text "E14" at 4220,2520 h30
  text "B10" at 4325,2520 h30
  text "B11" at 4425,2520 h30
  text "5V" at 3695,2400 h30
  text "GND" at 3775,2400 h30
  text "TX" at 3890,2400 h30
  text "RX" at 3990,2400 h30
  text "H" at 4115,2400 h30
  text "L" at 4195,2400 h30